# Altium PCB PCB1.PcbDoc
Units mil, origin at the board's own origin, x right, y up, seen from the top; angles counter-clockwise.
Board outline 3886.07 x 1561.03 mil, 2 copper layers (Top Layer, Bottom Layer); 74 components, 43 nets, 186 pads, 8 vias.
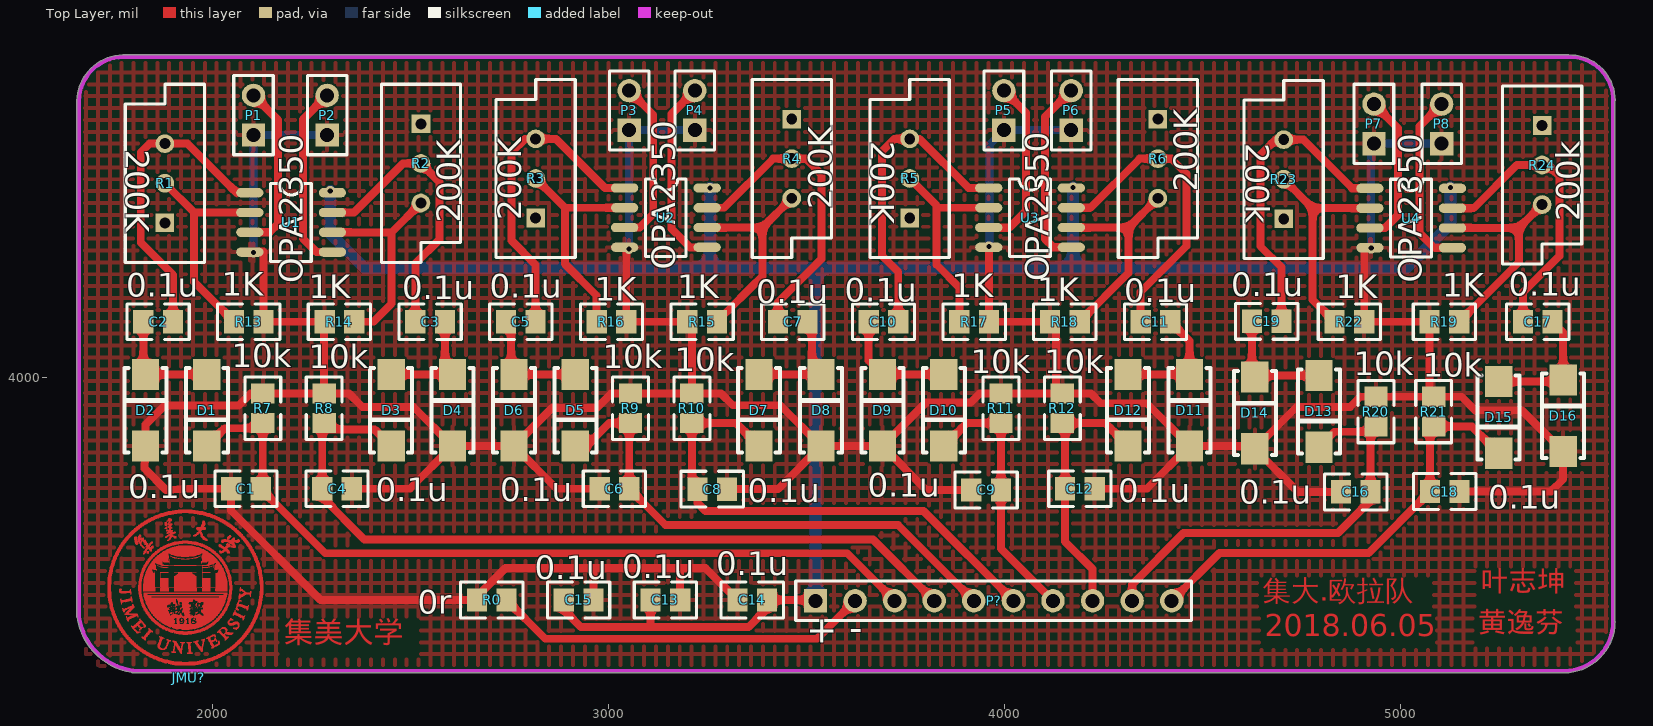
[diagram p0: Top Layer view]
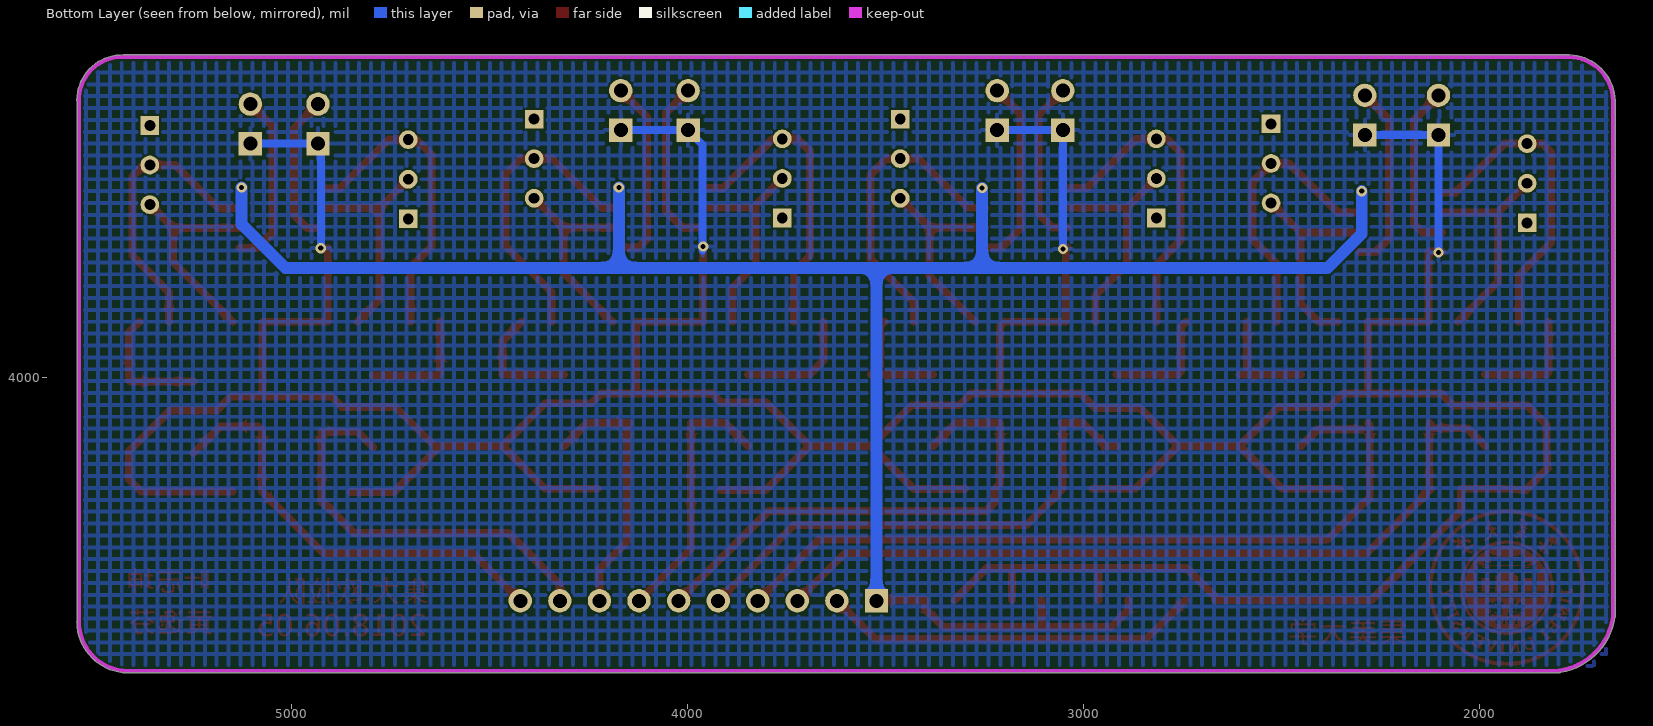
[diagram p1: Bottom Layer view, seen from below]
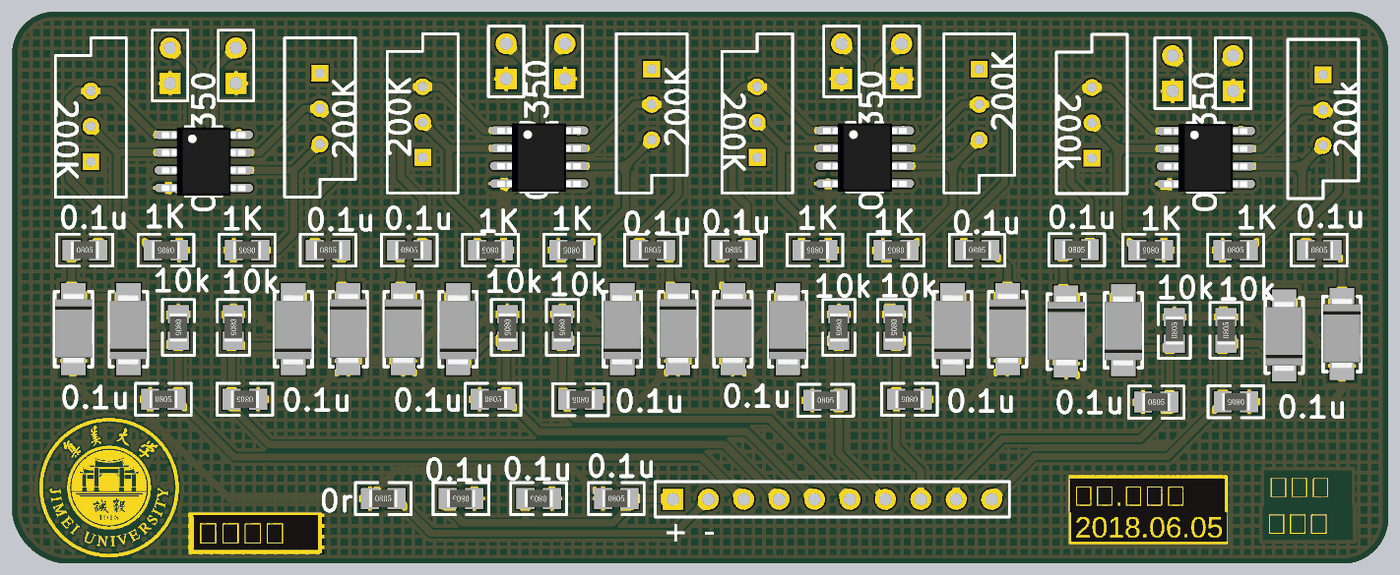
[diagram p2: 3D render of the assembled board from above, using the file's embedded part models]

## Layer stack, top to bottom
Top Solder: solder mask 0.4, Solder Resist, Dk 3.5
Top Layer: signal copper 1.4
Dielectric 1: dielectric 12.6, FR-4, Dk 4.8
Bottom Layer: signal copper 1.4
Bottom Solder: solder mask 0.4, Solder Resist, Dk 3.5

## Board outline
1794.62,3254.3 cw(c1821,3418) 1657.04,3393.25 cw(c1662,3394) 1656.98,3394 1656.98,4698 cw(c1662,4698) 1656.99,4698.09 cw(c1775,4696) 1772.91,4814.01 cw(c1773,4809) 1773,4814.02 5425.93,4814.02 cw(c5429,4700) 5543.06,4700 cw(c5429,4700) 5543.02,4696.93 cw(c5429,4700) 5543.01,4696.86 5543.02,4697 5543.02,3382.4 cw(c5538.02,3382) 5543.03,3382 cw(c5414,3382) 5543.01,3379.92 ccw(c5538,3380) 5543.02,3380 5543.01,3379.92 cw(c5414,3382) 5416.08,3252.99 cw(c5416,3258) 5416,3252.99 1798,3252.99 cw(c1798,3258)

## Design rules (kind name [scope] priority, off if disabled: settings)
Clearance [All] p1: gap=5
PolygonConnect [All] p1: connectstyle=Relief reliefconductorwidth=10 reliefentries=4 polygonreliefangle="90 Angle" airgapwidth=10
RoutingVias [All] p1: holewidth=28 width=50 viastyle="Through Hole" minholewidth=28 minwidth=50 maxholewidth=28 maxwidth=50
SolderMaskExpansion [All] p1: expansion=4
Width [All] p1: maxlimit=60 minlimit=10 preferedwidth=10 minimp=50.000000 maximp=50.000000 favimp=50.000000
30 further rules are at their usual default settings.

## Components (designator, comment, footprint, x,y, rotation, side; value= is the part's Value field where it differs from the comment)
C1 "0.1u" 0805 2084,3723 r0 top
C2 "0.1u" 0805 1862,4145 r0 top
C3 "0.1u" 0805 2549.27,4145 r0 top
C4 "0.1u" 0805 2314,3713 r180 top
C5 "0.1u" 0805 2778.36,4145 r0 top
C6 "0.1u" 0805 3015,3723 r0 top
C7 "0.1u" 0805 3465.64,4145 r0 top
C8 "0.1u" 0805 3262,3712 r180 top
C9 "0.1u" 0805 3954,3720 r0 top
C10 "0.1u" 0805 3694.73,4145 r0 top
C11 "0.1u" 0805 4382,4145 r0 top
C12 "0.1u" 0805 4191,3713 r180 top
C13 "0.1u" 0805 3143.67,3432 r180 top
C14 "0.1u" 0805 3363,3442 r0 top
C15 "0.1u" 0805 2924.33,3432 r180 top
C16 "0.1u" 0805 4888,3715 r0 top
C17 "0.1u" 0805 5348,4145 r0 top
C18 "0.1u" 0805 5113,3706 r180 top
C19 "0.1u" 0805 4663,4146 r0 top
D1 "二极管" 二极管 1985.18,3912 r270 top
D2 "二极管" 二极管 1830,3920.9 r90 top
D3 "二极管" 二极管 2450.71,3912 r270 top
D4 "二极管" 二极管 2605.88,3920.9 r90 top
D5 "二极管" 二极管 2916.23,3912 r270 top
D6 "二极管" 二极管 2761.06,3920.9 r90 top
D7 "二极管" 二极管 3380,3912 r270 top
D8 "二极管" 二极管 3536.94,3920.9 r90 top
D9 "二极管" 二极管 3692.12,3920.9 r90 top
D10 "二极管" 二极管 3847.29,3912 r270 top
D11 "二极管" 二极管 4468,3920.9 r90 top
D12 "二极管" 二极管 4312.82,3912 r270 top
D13 "二极管" 二极管 4795,3909 r270 top
D14 "二极管" 二极管 4633,3914 r90 top
D15 "二极管" 二极管 5249,3894 r270 top
D16 "二极管" 二极管 5412,3907 r90 top
JMU? "LOGO(JMU)" JMU_logo（1） 1940,3241 r0 top
P1 "Header 2" HDR1X2 2103,4612 r90 top
P2 "Header 2" HDR1X2 2289,4612 r90 top
P3 "Header 2" HDR1X2 3052,4624 r90 top
P4 "Header 2" HDR1X2 3218,4624 r90 top
P5 "Header 2" HDR1X2 3999,4624 r90 top
P6 "Header 2" HDR1X2 4169,4624 r90 top
P7 "Header 2" HDR1X2 4934,4590 r90 top
P8 "Header 2" HDR1X2 5105,4590 r90 top
P? "Header 10" HDR1X10 3523,3435 r0 top
R0 "0r" 0805 2705,3442 r0 top
R1 "200K" VR5 1879,4490 r90 top
R2 "200K" VR5 2526,4540 r270 top
R3 "200K" VR5 2816,4502 r90 top
R4 "200K" VR5 3463,4552 r270 top
R5 "200K" VR5 3761,4502 r90 top
R6 "200K" VR5 4388,4552 r270 top
R7 "10k" 0805 2131.42,3921.31 r270 top
R8 "10k" 0805 2286.59,3921.31 r270 top
R9 "10k" 0805 3060.47,3921.31 r270 top
R10 "10k" 0805 3215.65,3921.31 r270 top
R11 "10k" 0805 3996.53,3921.31 r270 top
R12 "10k" 0805 4151.71,3921.31 r270 top
R13 "1K" 0805 2091.09,4135 r180 top
R14 "1K" 0805 2320.18,4135 r180 top
R15 "1K" 0805 3236.55,4135 r180 top
R16 "1K" 0805 3007.45,4135 r180 top
R17 "1K" 0805 3923.82,4135 r180 top
R18 "1K" 0805 4152.91,4135 r180 top
R19 "1K" 0805 5112,4145 r0 top
R20 "10k" 0805 4934,3913 r90 top
R21 "10k" 0805 5080,3913 r90 top
R22 "1K" 0805 4872,4135 r180 top
R23 "200k" VR5 4706,4500 r90 top
R24 "200k" VR5 5359,4536 r270 top
U1 "OPA2350" SOIC-8 2198,4391 r0 top
U2 "OPA2350" SOIC-8 3145,4403 r0 top
U3 "OPA2350" SOIC-8 4065,4403 r0 top
U4 "OPA2350" SOIC-8 5028,4402 r0 top

## Footprints (in the part's own frame and the unit in brackets; to place one, negate y for a bottom-side part, rotate by r counter-clockwise, add the part's x,y. Pads: shape width x height; smd on the part's side, far side on the other; paste and mask are expansions set on the pad)
0805 [mm]
  rect 1.3x1.5 smd: 1(-0.95,-0.127) 2(0.95,-0.127)
  silkscreen extent -2,-1.28 2,1.02, body extent -1,-0.76 1,0.5, height 0.55
HDR1X2 [mm] "Connector; Header; 2 Position"
  rect 1.5x1.5 hole 0.9: 1(0,0)
  round 1.5 hole 0.9: 2(2.54,0)
  silkscreen extent -1.27,-1.27 3.81,1.27
HDR1X10 [mm] "Connector; Header; 10 Position"
  rect 1.5x1.5 hole 0.9: 1(0,0)
  round 1.5 hole 0.9: 2(2.54,0) 3(5.08,0) 4(7.62,0) 5(10.16,0) 6(12.7,0) 7(15.24,0) 8(17.78,0) 9(20.32,0) 10(22.86,0)
  silkscreen extent -1.27,-1.27 24.13,1.27
JMU_logo（1） [mil]
  Top Layer region: 8.21,175.64 7.21,175.64 7.21,176.64 8.21,176.64
  Top Layer region: 27.21,181.64 26.21,181.64 26.21,180.64 24.21,180.64 24.21,183.64 27.21,183.64
  Top Layer region: -42.79,162.64 -43.79,162.64 -43.79,161.64 -46.79,161.64 -46.79,163.64 -44.79,163.64 -44.79,164.64 -42.79,164.64
  Top Layer region: -32.79,175.64 -31.79,175.64 -31.79,174.64 -30.79,174.64 -30.79,173.64 -31.79,173.64 -31.79,172.64 -32.79,172.64 -32.79,171.64 -33.79,171.64 -33.79,176.64 -32.79,176.64
  Top Layer region: -29.79,165.64 -30.79,165.64 -30.79,164.64 -31.79,164.64 -31.79,163.64 -33.79,163.64 -33.79,164.64 -34.79,164.64 -34.79,166.64 -31.79,166.64 -31.79,167.64 -29.79,167.64
  Top Layer region: -103.79,318.64 -101.79,318.64 -101.79,313.64 -102.79,313.64 -102.79,312.64 -104.79,312.64 -104.79,313.64 -105.79,313.64 -105.79,314.64 -106.79,314.64 -106.79,319.64 -103.79,319.64
  Top Layer region: -89.79,330.64 -88.79,330.64 -88.79,329.64 -89.79,329.64 -89.79,327.64 -90.79,327.64 -90.79,326.64 -92.79,326.64 -92.79,325.64 -93.79,325.64 -93.79,324.64 -95.79,324.64 -95.79,325.64 -94.79,325.64 -94.79,327.64 -95.79,327.64 -95.79,326.64 -97.79,326.64 -97.79,328.64 -96.79,328.64 -96.79,329.64 -95.79,329.64 -95.79,330.64 -94.79,330.64 -94.79,331.64 -92.79,331.64 -92.79,332.64 -89.79,332.64
  Top Layer region: -40.79,358.64 -37.79,358.64 -37.79,357.64 -34.79,357.64 -34.79,356.64 -32.79,356.64 -32.79,355.64 -31.79,355.64 -31.79,352.64 -32.79,352.64 -32.79,351.64 -36.79,351.64 -36.79,352.64 -37.79,352.64 -37.79,354.64 -39.79,354.64 -39.79,355.64 -41.79,355.64 -41.79,356.64 -42.79,356.64 -42.79,358.64 -41.79,358.64 -41.79,359.64 -40.79,359.64
  Top Layer region: 105.21,357.64 106.21,357.64 106.21,355.64 105.21,355.64 105.21,354.64 104.21,354.64 104.21,353.64 103.21,353.64 103.21,351.64 102.21,351.64 102.21,350.64 101.21,350.64 101.21,349.64 99.21,349.64 99.21,348.64 97.21,348.64 97.21,349.64 96.21,349.64 96.21,352.64 97.21,352.64 97.21,354.64 98.21,354.64 98.21,355.64 99.21,355.64 99.21,356.64 100.21,356.64 100.21,357.64 101.21,357.64 101.21,359.64 105.21,359.64
  Top Layer region: 7.21,87.64 4.21,87.64 4.21,86.64 3.21,86.64 3.21,78.64 4.21,78.64 4.21,64.64 5.21,64.64 5.21,62.64 9.21,62.64 9.21,61.64 8.21,61.64 8.21,60.64 -4.79,60.64 -4.79,61.64 -3.79,61.64 -3.79,62.64 -0.79,62.64 -0.79,72.64 -1.79,72.64 -1.79,86.64 -3.79,86.64 -3.79,87.64 -5.79,87.64 -5.79,89.64 7.21,89.64
  Top Layer region: -100.79,123.64 -99.79,123.64 -99.79,122.64 -98.79,122.64 -98.79,121.64 -97.79,121.64 -97.79,120.64 -96.79,120.64 -96.79,119.64 -94.79,119.64 -94.79,118.64 -93.79,118.64 -93.79,117.64 -92.79,117.64 -92.79,116.64 -91.79,116.64 -91.79,114.64 -93.79,114.64 -93.79,115.64 -96.79,115.64 -96.79,114.64 -97.79,114.64 -97.79,113.64 -98.79,113.64 -98.79,112.64 -99.79,112.64 -99.79,111.64 -100.79,111.64 -100.79,109.64 -101.79,109.64 -101.79,108.64 -102.79,108.64 -102.79,107.64 -103.79,107.64 -103.79,106.64 -104.79,106.64 -104.79,105.64 -105.79,105.64 -105.79,103.64 -106.79,103.64 -106.79,102.64 -107.79,102.64 -107.79,101.64 -108.79,101.64 -108.79,100.64 -109.79,100.64 -109.79,98.64 -110.79,98.64 -110.79,96.64 -109.79,96.64 -109.79,95.64 -108.79,95.64 -108.79,94.64 -109.79,94.64 -109.79,93.64 -110.79,93.64 -110.79,94.64 -111.79,94.64 -111.79,95.64 -112.79,95.64 -112.79,96.64 -113.79,96.64 -113.79,97.64 -115.79,97.64 -115.79,98.64 -116.79,98.64 -116.79,99.64 -117.79,99.64 -117.79,100.64 -118.79,100.64 -118.79,101.64 -119.79,101.64 -119.79,102.64 -116.79,102.64 -116.79,101.64 -114.79,101.64 -114.79,102.64 -113.79,102.64 -113.79,103.64 -112.79,103.64 -112.79,104.64 -111.79,104.64 -111.79,106.64 -110.79,106.64 -110.79,107.64 -109.79,107.64 -109.79,108.64 -108.79,108.64 -108.79,109.64 -107.79,109.64 -107.79,111.64 -106.79,111.64 -106.79,112.64 -105.79,112.64 -105.79,113.64 -104.79,113.64 -104.79,114.64 -103.79,114.64 -103.79,115.64 -102.79,115.64 -102.79,117.64 -101.79,117.64 -101.79,118.64 -100.79,118.64 -100.79,121.64 -101.79,121.64 -101.79,122.64 -102.79,122.64 -102.79,123.64 -101.79,123.64 -101.79,124.64 -100.79,124.64
  Top Layer region: -144.79,199.64 -143.79,199.64 -143.79,194.64 -142.79,194.64 -142.79,190.64 -144.79,190.64 -144.79,192.64 -145.79,192.64 -145.79,193.64 -150.79,193.64 -150.79,192.64 -155.79,192.64 -155.79,191.64 -160.79,191.64 -160.79,190.64 -165.79,190.64 -165.79,189.64 -168.79,189.64 -168.79,188.64 -169.79,188.64 -169.79,184.64 -170.79,184.64 -170.79,185.64 -171.79,185.64 -171.79,190.64 -172.79,190.64 -172.79,195.64 -173.79,195.64 -173.79,197.64 -172.79,197.64 -172.79,198.64 -171.79,198.64 -171.79,196.64 -170.79,196.64 -170.79,195.64 -169.79,195.64 -169.79,194.64 -168.79,194.64 -168.79,195.64 -162.79,195.64 -162.79,196.64 -158.79,196.64 -158.79,197.64 -152.79,197.64 -152.79,198.64 -148.79,198.64 -148.79,199.64 -146.79,199.64 -146.79,203.64 -144.79,203.64
  Top Layer region: 117.21,168.64 118.21,168.64 118.21,167.64 117.21,167.64 117.21,164.64 118.21,164.64 118.21,163.64 120.21,163.64 120.21,162.64 122.21,162.64 122.21,161.64 124.21,161.64 124.21,160.64 126.21,160.64 126.21,159.64 128.21,159.64 128.21,158.64 130.21,158.64 130.21,157.64 132.21,157.64 132.21,156.64 134.21,156.64 134.21,155.64 136.21,155.64 136.21,154.64 139.21,154.64 139.21,155.64 140.21,155.64 140.21,156.64 142.21,156.64 142.21,155.64 141.21,155.64 141.21,153.64 140.21,153.64 140.21,150.64 139.21,150.64 139.21,148.64 138.21,148.64 138.21,146.64 137.21,146.64 137.21,144.64 135.21,144.64 135.21,149.64 134.21,149.64 134.21,150.64 132.21,150.64 132.21,151.64 129.21,151.64 129.21,152.64 128.21,152.64 128.21,153.64 126.21,153.64 126.21,154.64 124.21,154.64 124.21,155.64 122.21,155.64 122.21,156.64 120.21,156.64 120.21,157.64 118.21,157.64 118.21,158.64 116.21,158.64 116.21,159.64 114.21,159.64 114.21,158.64 113.21,158.64 113.21,157.64 112.21,157.64 112.21,156.64 111.21,156.64 111.21,157.64 110.21,157.64 110.21,158.64 111.21,158.64 111.21,160.64 112.21,160.64 112.21,162.64 113.21,162.64 113.21,164.64 114.21,164.64 114.21,166.64 115.21,166.64 115.21,168.64 116.21,168.64 116.21,169.64 117.21,169.64
  Top Layer region: -170.79,223.64 -169.79,223.64 -169.79,221.64 -170.79,221.64 -170.79,220.64 -171.79,220.64 -171.79,219.64 -173.79,219.64 -173.79,217.64 -162.79,217.64 -162.79,218.64 -150.79,218.64 -150.79,219.64 -148.79,219.64 -148.79,223.64 -146.79,223.64 -146.79,216.64 -145.79,216.64 -145.79,210.64 -146.79,210.64 -146.79,209.64 -147.79,209.64 -147.79,212.64 -148.79,212.64 -148.79,213.64 -158.79,213.64 -158.79,212.64 -172.79,212.64 -172.79,213.64 -173.79,213.64 -173.79,214.64 -174.79,214.64 -174.79,215.64 -175.79,215.64 -175.79,217.64 -176.79,217.64 -176.79,221.64 -175.79,221.64 -175.79,223.64 -174.79,223.64 -174.79,224.64 -170.79,224.64
  Top Layer region: 128.21,195.64 131.21,195.64 131.21,194.64 133.21,194.64 133.21,192.64 127.21,192.64 127.21,190.64 126.21,190.64 126.21,188.64 125.21,188.64 125.21,186.64 126.21,186.64 126.21,185.64 129.21,185.64 129.21,184.64 132.21,184.64 132.21,183.64 136.21,183.64 136.21,182.64 139.21,182.64 139.21,181.64 142.21,181.64 142.21,180.64 145.21,180.64 145.21,179.64 148.21,179.64 148.21,180.64 149.21,180.64 149.21,182.64 151.21,182.64 151.21,179.64 150.21,179.64 150.21,176.64 149.21,176.64 149.21,172.64 148.21,172.64 148.21,169.64 146.21,169.64 146.21,173.64 145.21,173.64 145.21,174.64 143.21,174.64 143.21,175.64 140.21,175.64 140.21,176.64 137.21,176.64 137.21,177.64 134.21,177.64 134.21,178.64 130.21,178.64 130.21,179.64 127.21,179.64 127.21,180.64 124.21,180.64 124.21,181.64 123.21,181.64 123.21,178.64 122.21,178.64 122.21,174.64 123.21,174.64 123.21,172.64 125.21,172.64 125.21,171.64 126.21,171.64 126.21,170.64 122.21,170.64 122.21,171.64 119.21,171.64 119.21,172.64 118.21,172.64 118.21,174.64 119.21,174.64 119.21,178.64 120.21,178.64 120.21,181.64 121.21,181.64 121.21,184.64 122.21,184.64 122.21,187.64 123.21,187.64 123.21,190.64 124.21,190.64 124.21,194.64 125.21,194.64 125.21,196.64 128.21,196.64
  Top Layer region: 40.21,95.64 39.21,95.64 39.21,94.64 38.21,94.64 38.21,90.64 37.21,90.64 37.21,84.64 36.21,84.64 36.21,78.64 35.21,78.64 35.21,73.64 34.21,73.64 34.21,72.64 35.21,72.64 35.21,71.64 34.21,71.64 34.21,66.64 33.21,66.64 33.21,64.64 32.21,64.64 32.21,65.64 31.21,65.64 31.21,66.64 30.21,66.64 30.21,67.64 29.21,67.64 29.21,68.64 28.21,68.64 28.21,70.64 27.21,70.64 27.21,71.64 26.21,71.64 26.21,72.64 25.21,72.64 25.21,74.64 24.21,74.64 24.21,75.64 23.21,75.64 23.21,76.64 22.21,76.64 22.21,78.64 21.21,78.64 21.21,79.64 20.21,79.64 20.21,81.64 19.21,81.64 19.21,82.64 18.21,82.64 18.21,83.64 17.21,83.64 17.21,85.64 16.21,85.64 16.21,86.64 15.21,86.64 15.21,87.64 14.21,87.64 14.21,88.64 11.21,88.64 11.21,90.64 14.21,90.64 14.21,91.64 18.21,91.64 18.21,92.64 22.21,92.64 22.21,93.64 23.21,93.64 23.21,90.64 20.21,90.64 20.21,89.64 21.21,89.64 21.21,87.64 22.21,87.64 22.21,85.64 23.21,85.64 23.21,84.64 24.21,84.64 24.21,83.64 25.21,83.64 25.21,81.64 26.21,81.64 26.21,80.64 27.21,80.64 27.21,79.64 28.21,79.64 28.21,77.64 29.21,77.64 29.21,76.64 30.21,76.64 30.21,75.64 31.21,75.64 31.21,74.64 32.21,74.64 32.21,79.64 33.21,79.64 33.21,84.64 34.21,84.64 34.21,91.64 35.21,91.64 35.21,93.64 31.21,93.64 31.21,95.64 34.21,95.64 34.21,96.64 39.21,96.64 39.21,97.64 40.21,97.64
  Top Layer region: 106.21,148.64 108.21,148.64 108.21,147.64 110.21,147.64 110.21,146.64 112.21,146.64 112.21,144.64 104.21,144.64 104.21,143.64 103.21,143.64 103.21,142.64 102.21,142.64 102.21,141.64 101.21,141.64 101.21,138.64 102.21,138.64 102.21,137.64 103.21,137.64 103.21,136.64 108.21,136.64 108.21,137.64 110.21,137.64 110.21,138.64 112.21,138.64 112.21,139.64 115.21,139.64 115.21,140.64 123.21,140.64 123.21,139.64 124.21,139.64 124.21,138.64 125.21,138.64 125.21,137.64 126.21,137.64 126.21,136.64 127.21,136.64 127.21,128.64 126.21,128.64 126.21,127.64 125.21,127.64 125.21,125.64 124.21,125.64 124.21,124.64 123.21,124.64 123.21,123.64 121.21,123.64 121.21,120.64 119.21,120.64 119.21,121.64 117.21,121.64 117.21,122.64 115.21,122.64 115.21,123.64 112.21,123.64 112.21,125.64 120.21,125.64 120.21,126.64 122.21,126.64 122.21,127.64 123.21,127.64 123.21,128.64 124.21,128.64 124.21,132.64 123.21,132.64 123.21,134.64 120.21,134.64 120.21,135.64 118.21,135.64 118.21,134.64 115.21,134.64 115.21,133.64 113.21,133.64 113.21,132.64 111.21,132.64 111.21,131.64 107.21,131.64 107.21,130.64 105.21,130.64 105.21,131.64 102.21,131.64 102.21,132.64 101.21,132.64 101.21,133.64 100.21,133.64 100.21,134.64 99.21,134.64 99.21,136.64 98.21,136.64 98.21,140.64 99.21,140.64 99.21,142.64 100.21,142.64 100.21,144.64 101.21,144.64 101.21,145.64 102.21,145.64 102.21,146.64 104.21,146.64 104.21,149.64 106.21,149.64
  Top Layer region: 130.21,227.64 131.21,227.64 131.21,224.64 132.21,224.64 132.21,223.64 134.21,223.64 134.21,222.64 135.21,222.64 135.21,221.64 136.21,221.64 136.21,220.64 137.21,220.64 137.21,219.64 139.21,219.64 139.21,218.64 140.21,218.64 140.21,217.64 141.21,217.64 141.21,216.64 142.21,216.64 142.21,215.64 144.21,215.64 144.21,214.64 152.21,214.64 152.21,213.64 154.21,213.64 154.21,214.64 155.21,214.64 155.21,217.64 157.21,217.64 157.21,212.64 156.21,212.64 156.21,204.64 154.21,204.64 154.21,207.64 153.21,207.64 153.21,208.64 148.21,208.64 148.21,209.64 143.21,209.64 143.21,208.64 141.21,208.64 141.21,207.64 139.21,207.64 139.21,206.64 137.21,206.64 137.21,205.64 135.21,205.64 135.21,204.64 134.21,204.64 134.21,203.64 132.21,203.64 132.21,202.64 130.21,202.64 130.21,201.64 129.21,201.64 129.21,200.64 128.21,200.64 128.21,198.64 126.21,198.64 126.21,206.64 127.21,206.64 127.21,211.64 129.21,211.64 129.21,208.64 131.21,208.64 131.21,209.64 133.21,209.64 133.21,210.64 135.21,210.64 135.21,211.64 137.21,211.64 137.21,212.64 139.21,212.64 139.21,213.64 140.21,213.64 140.21,214.64 139.21,214.64 139.21,215.64 138.21,215.64 138.21,216.64 136.21,216.64 136.21,217.64 135.21,217.64 135.21,218.64 134.21,218.64 134.21,219.64 132.21,219.64 132.21,220.64 130.21,220.64 130.21,218.64 128.21,218.64 128.21,224.64 129.21,224.64 129.21,228.64 130.21,228.64
  Top Layer region: -73.79,103.64 -71.79,103.64 -71.79,102.64 -68.79,102.64 -68.79,101.64 -66.79,101.64 -66.79,100.64 -63.79,100.64 -63.79,99.64 -62.79,99.64 -62.79,97.64 -64.79,97.64 -64.79,98.64 -66.79,98.64 -66.79,97.64 -67.79,97.64 -67.79,95.64 -68.79,95.64 -68.79,92.64 -69.79,92.64 -69.79,89.64 -70.79,89.64 -70.79,87.64 -71.79,87.64 -71.79,84.64 -72.79,84.64 -72.79,81.64 -73.79,81.64 -73.79,76.64 -72.79,76.64 -72.79,75.64 -71.79,75.64 -71.79,74.64 -70.79,74.64 -70.79,73.64 -68.79,73.64 -68.79,72.64 -62.79,72.64 -62.79,73.64 -61.79,73.64 -61.79,74.64 -60.79,74.64 -60.79,75.64 -59.79,75.64 -59.79,76.64 -58.79,76.64 -58.79,78.64 -57.79,78.64 -57.79,81.64 -56.79,81.64 -56.79,84.64 -55.79,84.64 -55.79,86.64 -54.79,86.64 -54.79,89.64 -53.79,89.64 -53.79,93.64 -54.79,93.64 -54.79,94.64 -55.79,94.64 -55.79,96.64 -53.79,96.64 -53.79,95.64 -50.79,95.64 -50.79,94.64 -48.79,94.64 -48.79,93.64 -45.79,93.64 -45.79,91.64 -49.79,91.64 -49.79,90.64 -50.79,90.64 -50.79,88.64 -51.79,88.64 -51.79,86.64 -52.79,86.64 -52.79,83.64 -53.79,83.64 -53.79,80.64 -54.79,80.64 -54.79,78.64 -55.79,78.64 -55.79,76.64 -56.79,76.64 -56.79,74.64 -57.79,74.64 -57.79,72.64 -59.79,72.64 -59.79,71.64 -60.79,71.64 -60.79,70.64 -62.79,70.64 -62.79,69.64 -68.79,69.64 -68.79,70.64 -71.79,70.64 -71.79,71.64 -73.79,71.64 -73.79,72.64 -75.79,72.64 -75.79,73.64 -76.79,73.64 -76.79,74.64 -77.79,74.64 -77.79,76.64 -78.79,76.64 -78.79,83.64 -77.79,83.64 -77.79,86.64 -76.79,86.64 -76.79,89.64 -75.79,89.64 -75.79,91.64 -74.79,91.64 -74.79,94.64 -73.79,94.64 -73.79,97.64 -72.79,97.64 -72.79,101.64 -74.79,101.64 -74.79,104.64 -73.79,104.64
  Top Layer region: 215 vertices and 0 holes, not listed, extent -145.79,111.64 -108.79,148.64
  Top Layer region: 177 vertices and 0 holes, not listed, extent 43.21,73.64 78.21,109.64
  Top Layer region: -37.79,91.64 -32.79,91.64 -32.79,90.64 -31.79,90.64 -31.79,88.64 -30.79,88.64 -30.79,86.64 -29.79,86.64 -29.79,85.64 -28.79,85.64 -28.79,83.64 -27.79,83.64 -27.79,82.64 -26.79,82.64 -26.79,80.64 -25.79,80.64 -25.79,78.64 -24.79,78.64 -24.79,77.64 -23.79,77.64 -23.79,75.64 -22.79,75.64 -22.79,73.64 -21.79,73.64 -21.79,72.64 -20.79,72.64 -20.79,70.64 -19.79,70.64 -19.79,78.64 -18.79,78.64 -18.79,87.64 -21.79,87.64 -21.79,89.64 -14.79,89.64 -14.79,88.64 -10.79,88.64 -10.79,87.64 -11.79,87.64 -11.79,86.64 -14.79,86.64 -14.79,84.64 -15.79,84.64 -15.79,78.64 -16.79,78.64 -16.79,70.64 -17.79,70.64 -17.79,62.64 -18.79,62.64 -18.79,60.64 -20.79,60.64 -20.79,62.64 -21.79,62.64 -21.79,63.64 -22.79,63.64 -22.79,65.64 -23.79,65.64 -23.79,66.64 -24.79,66.64 -24.79,68.64 -25.79,68.64 -25.79,70.64 -26.79,70.64 -26.79,71.64 -27.79,71.64 -27.79,73.64 -28.79,73.64 -28.79,74.64 -29.79,74.64 -29.79,76.64 -30.79,76.64 -30.79,78.64 -31.79,78.64 -31.79,80.64 -32.79,80.64 -32.79,81.64 -33.79,81.64 -33.79,83.64 -34.79,83.64 -34.79,79.64 -35.79,79.64 -35.79,71.64 -36.79,71.64 -36.79,64.64 -33.79,64.64 -33.79,62.64 -41.79,62.64 -41.79,63.64 -44.79,63.64 -44.79,64.64 -43.79,64.64 -43.79,65.64 -40.79,65.64 -40.79,66.64 -39.79,66.64 -39.79,71.64 -38.79,71.64 -38.79,79.64 -37.79,79.64 -37.79,86.64 -36.79,86.64 -36.79,87.64 -37.79,87.64 -37.79,89.64 -39.79,89.64 -39.79,90.64 -40.79,90.64 -40.79,92.64 -37.79,92.64
  Top Layer region: 139 vertices and 1 holes, not listed, extent 71.21,93.64 111.21,127.64
  Top Layer region: 195 vertices and 0 holes, not listed, extent -168.79,142.64 -127.79,185.64
  Top Layer region: 155 vertices and 0 holes, not listed, extent 10.21,345.64 47.21,395.64
  Top Layer region: 241 vertices and 4 holes, not listed, extent -60.79,345.64 -33.79,402.64
  Top Layer region: 219 vertices and 1 holes, not listed, extent -138.79,311.64 -91.79,360.64
  Top Layer region: 251 vertices and 0 holes, not listed, extent 75.21,313.64 128.21,352.64
  Top Layer region: 261 vertices and 22 holes, not listed, extent -114.79,120.64 96.21,214.64
  Top Layer region: 309 vertices and 19 holes, not listed, extent -115.79,217.64 97.21,333.64
  Top Layer region: 557 vertices and 1 holes, not listed, extent -127.79,108.64 109.21,345.64
  Top Layer region: 917 vertices and 1 holes, not listed, extent -205.79,30.64 187.21,423.64
SOIC-8 [mm]
  oval 1.75x0.6 smd: 1(-2.65,1.905) 2(-2.65,0.635) 3(-2.65,-0.635) 4(-2.65,-1.905) 5(2.65,-1.905) 6(2.65,-0.635) 7(2.65,0.635) 8(2.65,1.905)
  silkscreen extent -1.32,-2.5 1.3,2.49, body extent -3,-2.47 2.99,2.43, height 1.55
VR5 [mm] "Thru-Hole; 3 Leads"
  rect 1.2x1.2 hole 0.7: 1(-2.54,0)
  round 1.2 hole 0.7: 2(0,0) 3(2.54,0)
  silkscreen extent -5.08,-2.54 6.35,2.54
二极管 [mm] "SS-14/M7"
  rect 2x1.75 smd: 1(-2.413,0) 2(2.187,0)
  silkscreen extent -2.81,-1.35 2.59,1.35, body extent -2.61,-1.34 2.49,1.33, height 2.12

## Part data
C1 C2 C3 C4 C5 C6 C7 C8 C9 C10 C11 C12 C13 C14 C15 C16 C17 C18 C19: library part Cap, "无极电容"
JMU?: library part JMU-LOGO
P1 P2 P3 P4 P5 P6 P7 P8: "Header, 2-Pin"
P?: "Header, 10-Pin"
R0 R7 R8 R9 R10 R11 R12 R13 R14 R15 R16 R17 R18 R19 R20 R21 R22: library part Res, "通用电阻"
R1 R2 R3 R4 R5 R6 R23 R24: library part RPot, "Potentiometer"
U1 U2 U3 U4: "运放芯片"

## Via types
v1: diameter 26, hole 13, Top Layer to Bottom Layer, 8 vias

## Nets (pads, with @x,y where several pads share a name; then routed paths per layer and width w, separated by ;. In a path a pad name is that pad's centre, name@x,y a point inside that pad or via, vN(x,y) a via of type N, cw(c..) or ccw(c..) an arc to the next point about the centre after c; other vN are vias at no path point)
AGND: C1.1 C4.1 C6.1 C8.1 C9.1 C12.1 C13.1 C14.1 C15.1 C16.1 C18.1 D2.1 D4.1 D6.1 D8.1 D9.1 D11.1 D14.1 D16.1 P1.1 P2.1 P3.1 P4.1 P5.1 P6.1 P7.1 P8.1 R0.1 R7.1 R8.1 R9.1 R10.1 R11.1 R12.1 R13.1 R14.2 R15.2 R16.1 R17.1 R18.2 R19.1 R20.2 R21.2 R22.1 U1.4 U2.4 U3.4 U4.4 | length 12023.6
  Top Layer w20: U1.4 2095.16,4317.49 2128.49,4317.49 R13.1 R14.2 ; R14.2@2281.59,4138.81 R8.1 ; C4.1 2497.98,3718 D4.1 ; C15.1 2961.74,3514.74 ; C6.1 2868.96,3718 D6.1 ; U2.4 3044.86,4323.81 R16.1 R15.2 3210.65,4128.49 R10.1 ; C13.1 3181.07,3514 ; C8.1 3428.04,3717 D8.1 ; C14.1 3244.6,3518 2740,3518 2667.6,3445.6 R0.1 2272,3437 2046.6,3662.4 C1.1 1937.9,3718 1881.92,3714.97 1827.97,3768.92 D2.1 1830,3880 1878,3928 2065,3928 2095.71,3958.71 R7.1 R8.1 ; C9.1 3803.01,3715 D9.1 ; U3.4@3961.22,4327.45 R17.1 4115.5,4139.09 4130.51,4139 R12.1@4130.51,3962.22 ; C12.1 4360.1,3718 D11.1 ; D14.1@4626.1,3825.9 D11.1 ; C16.1 4742,3710 D14.1 4739,3925 4874,3925 4899.4,3950.4 R20.2 R21.2 5155.6,3950.4 5190,3916 5308,3916 D16.1 5412,3742 5381,3711 C18.1 ; U4.4@4909.4,4326 R22.1 R19.1 R21.2@5074.6,3960.8 ; R8.1 2344.29,3958.71 2378,3925 2506.78,3925 D4.1 ; D4.1 D6.1 ; D6.1 2857.16,3922 2970,3922 3006.71,3958.71 R9.1 R10.1 ; R10.1 3284.29,3958.71 3314,3929 3433.84,3929 D8.1 ; D8.1 D9.1 ; D9.1 3802.22,3936 3915,3936 3937.71,3958.71 R11.1 R12.1 4219.29,3958.71 4244,3934 4359.9,3934 D11.1
  Bottom Layer w20: v1(2103,4315) P1.1 P2.1 ; v1(3052,4324) P3.1 P4.1 ; v1@3963,4320 3963,4588 P5.1 P6.1 ; v1(4927,4326) 4927,4583 P7.1 P8.1
  other v1: 3961,4330
GND: P?.2 R0.2 | length 961
  Top Layer w20: R0.2 2840.4,3339 3527,3339 P?.2
INA: P1.2 U1.3 | length 430.7
  Top Layer w20: U1.3 2144,4366 2165,4387 2165,4650 P1.2
INB: P2.2 U1.5 | length 475.7
  Top Layer w20: P2.2 2228,4651 2228,4350 2262,4316 U1.5
INC: P3.2 U2.3 | length 423.7
  Top Layer w20: U2.3 3079,4378 3113,4412 3113,4663 P3.2
IND: P4.2 U2.5 | length 483.2
  Top Layer w20: P4.2 3159,4665 3159,4375 3206,4328 U2.5
INE: P5.2 U3.3 | length 438.9
  Top Layer w20: U3.3 4013,4378 4055,4420 4055,4668 P5.2
INF: P6.2 U3.5 | length 477.4
  Top Layer w20: P6.2 4103,4658 4103,4349 4124,4328 U3.5
ING: P7.2 U4.3 | length 390.3
  Top Layer w20: U4.3 4962,4377 4995,4410 4995,4629 P7.2
INH: P8.2 U4.5 | length 447.9
  Top Layer w20: P8.2 5049,4634 5049,4364 5086,4327 U4.5
NetC2_1: C2.1 D1.1 D2.2 | length 290.4
  Top Layer w20: C2.1 1824.6,4012.4 D2.2 D1.1
NetC2_2: C2.2 R1.3 U1.1 | length 797.9
  Top Layer w20: C2.2 1899.4,4258.6 1818,4340 1818,4568 1840,4590 R1.3 1936,4590 2060,4466 U1.1
NetC3_1: C3.1 R2.2 U1.7 | length 719.8
  Top Layer w20: U1.7 2357,4416 2481,4540 R2.2 2573,4493 2573,4348 2511.87,4286.87 C3.1
NetC3_2: C3.2 D3.1 D4.2 | length 269
  Top Layer w20: D3.1 D4.2 ; D4.2@2586.67,4026.21 C3.2
NetC5_1: C5.1 D5.1 D6.2 | length 296.5
  Top Layer w20: C5.1 2754,4126.96 2754,4014.06 D6.2 D5.1
NetC5_2: C5.2 R3.3 U2.1 | length 804.3
  Top Layer w20: C5.2 2815.77,4284.23 2755,4345 2755,4568 2789,4602 R3.3 2867,4602 2991,4478 U2.1
NetC7_1: C7.1 R4.2 U2.7 | length 774.1
  Top Layer w20: U2.7 3292,4428 3416,4552 R4.2 3498,4552 3538,4512 3538,4299 3428.23,4189.23 C7.1
NetC7_2: C7.2 D7.1 D8.2 | length 304
  Top Layer w20: D7.1 D8.2 3514,4029.94 3514,4129.04 C7.2
NetC10_1: C10.1 D9.2 D10.1 | length 302.6
  Top Layer w20: C10.1 3657.33,4041.79 D9.2 D10.1
NetC10_2: C10.2 R5.3 U3.1 | length 781.9
  Top Layer w20: C10.2 3732.13,4265.87 3691,4307 3691,4571 3722,4602 R5.3 3786,4602 3910,4478 U3.1
NetC11_1: C11.1 R6.2 U3.7 | length 779.6
  Top Layer w20: U3.7 4218,4428 4342,4552 R6.2 4422,4552 4460,4514 4460,4331 4344.6,4215.6 C11.1
NetC11_2: C11.2 D11.2 D12.1 | length 308.3
  Top Layer w20: D12.1 D11.2 4468,4091.4 C11.2
NetC17_1: C17.1 R24.2 U4.7 | length 732.8
  Top Layer w20: U4.7 5186,4427 5295,4536 R24.2 5374,4536 5402.62,4507.38 5402.62,4306.62 5310.6,4214.6 C17.1
NetC17_2: C17.2 D15.1 D16.2 | length 322.6
  Top Layer w20: D15.1 5407.9,3989 D16.2 5412,4113.4 C17.2
NetC19_1: C19.1 D13.1 D14.2 | length 304.3
  Top Layer w20: C19.1 4625.6,4007.5 4629.1,4004 D13.1
NetC19_2: C19.2 R23.3 U4.1 | length 786.5
  Top Layer w20: C19.2 4700.4,4277.6 4647,4331 4647,4562 4685,4600 R23.3 4756,4600 4879,4477 U4.1
NetR1_2: R1.2 R13.2 U1.2 | length 563
  Top Layer w20: R1.2 1953,4416 ; R13.2 1953,4240.69 1953,4416 ; U1.2 1953,4416
NetR2_3: R2.3 R14.1 U1.6 | length 547.8
  Top Layer w20: U1.6 2452,4366 ; R14.1 2406,4140 2452,4186 2452,4366 ; R2.3 2452,4366
NetR3_2: R3.2 R16.2 U2.2 | length 576.5
  Top Layer w20: R3.2 2890,4428 ; R16.2 2970.05,4205.95 2890,4286 2890,4428 ; U2.2 2890,4428
NetR4_3: R4.3 R15.1 U2.6 | length 530
  Top Layer w20: U2.6 3389,4378 ; R15.1 3302.71,4168.76 3360.24,4226.29 3389,4255.05 3389,4378 ; R4.3 3389,4378
NetR5_2: R5.2 R17.2 U3.2 | length 539.6
  Top Layer w20: R5.2 3829,4434 3829,4284 3886.42,4226.58 R17.2 ; 3835,4428 U3.2
NetR6_3: R6.3 R18.1 U3.6 | length 538.6
  Top Layer w20: U3.6 4314,4378 ; R18.1 4314,4263.69 4314,4378 ; R6.3 4314,4378
NetR19_2: R19.2 R24.3 U4.6 | length 550.5
  Top Layer w20: U4.6 5300,4377 ; R19.2 5300,4290.6 5300,4377 ; R24.3 5300,4377
NetR22_2: R22.2 R23.2 U4.2 | length 557.9
  Top Layer w20: R23.2 4779,4427 ; R22.2 4779,4195.6 4779,4427 ; U4.2 4779,4427
OUTA: C1.2 D1.2 P?.3 R7.2 | length 2052.1
  Top Layer w20: D1.2 2030.28,3871 2113.51,3871 R7.2 2126.42,3723.01 C1.2 2284.4,3555 3603,3555 P?.3
OUTB: C4.2 D3.2 P?.4 R8.2 | length 2014.9
  Top Layer w20: R8.2 2276.6,3878.91 C4.2 2276.6,3696.4 2383,3590 3668,3590 P?.4 ; R8.2@2297.5,3868 2408.6,3868 D3.2
OUTC: C6.2 D5.2 P?.5 R9.2 | length 1318.3
  Top Layer w20: D5.2 2943.9,3825.9 3001.91,3883.91 R9.2 3052.4,3880.83 C6.2 3144.4,3626 3732,3626 P?.5
OUTD: C8.2 D7.2 P?.6 R10.2 | length 1301.5
  Top Layer w20: D7.2 3321.99,3883.91 R10.2 3210.65,3730.95 C8.2 3224.6,3682.4 3245,3662 3796,3662 P?.6
OUTE: C9.2 D10.2 P?.7 R11.2 | length 671.7
  Top Layer w20: D10.2 3905.3,3883.91 R11.2 3991.53,3715.13 C9.2 3991.4,3566.6 4024.3,3533.7 4090.1,3467.9 P?.7
OUTF: C12.2 D12.2 P?.8 R12.2 | length 670.6
  Top Layer w20: P?.8 4223,3515 4153.6,3584.4 C12.2 4153.6,3877.02 R12.2 4254.81,3883.91 D12.2
OUTG: C16.2 D13.2 P?.9 R20.1 | length 1051.6
  Top Layer w20: P?.9 4323,3476 4453,3606 4843,3606 4925.4,3688.4 C16.2 4925.4,3862 4834.1,3862 D13.2
OUTH: C18.2 D15.2 P?.10 R21.1 | length 1127.5
  Top Layer w20: P?.10 4544,3556 4920.6,3556 C18.2 5075.6,3866.2 R21.1 5181.3,3875.6 D15.2
VCC: C13.2 C14.2 C15.2 P?.1 U1.8 U2.8 U3.8 U4.8 | length 5144.4
  Top Layer w20: C15.2 2886.93,3412.07 2930,3369 3354,3369 3400.4,3415.4 C14.2 3521,3437 P?.1 ; 3106.27,3371.27 C13.2
  Bottom Layer w30: v1(2297,4470) 2297,4362 2383,4276 3256,4276 ; v1(3256,4478) 3256,4276 ; P?.1 3523,4276 ; v1(4174,4479) 4174,4276 ; v1(5127,4479) 5127,4386 5017,4276 4174,4276 ; 3256,4276 3523,4276 ; 3523,4276 4174,4276
pads on no net: R1.1 R2.1 R3.1 R4.1 R5.1 R6.1 R23.1 R24.1

## Polygon pours and split planes (outlines as drawn)
AGND on Bottom Layer "Top Layer-No Net" (hatched 90Degree grid 30 track 10, pour order 10): 1773,4809 1762,4809 ccw(c1762,4709) 1662,4709 1662,4698 1662,3394 1662,3358 ccw(c1762,3358) 1762,3258 1798,3258 5416,3258 5438,3258 ccw(c5438,3358) 5538,3358 5538,3396 5538,4700 cw(c5541,4700) 5541,4703 5541,4709 ccw(c5441,4709) 5441,4809 5426,4809 1773,4809
AGND on Top Layer "Top Layer-No Net" (hatched 90Degree grid 30 track 10, pour order 5): 1773,4809 1762,4809 ccw(c1762,4709) 1662,4709 1662,4645 1662,3394 1662,3358 ccw(c1762,3358) 1762,3258 1798,3258 5416,3258 5438,3258 ccw(c5438,3358) 5538,3358 5538,3380 5538,4696 5538,4709 ccw(c5438,4709) 5438,4809 5426,4809 1773,4809

## Keep-outs
Keep-Out Layer:
  lines w10: 1798,3258 5416,3258 ccw(c5414,3382) 5538.02,3382 ; 1798.12,3258.83 cw(c1821,3418) 1662,3394 1662,4698 cw(c1775,4696) 1773,4809 5426,4809 cw(c5429,4700) 5538,4697 5538,3380

## Other copper
Top Layer:
  text "叶志坤" at 5203,3441 h90
  text "集大.欧拉队" at 4653,3417 h90
  text "黄逸芬" at 5198,3338 h90
  text "2018.06.05" at 4658,3327 h95
  text "集美大学" at 2179,3310 h95

## Silkscreen, mask and mechanical layers (free items; w line width, h text height)
Top Overlay:
  text "-" at 3608,3311 h118.11
  text "+" at 3500,3306 h118.11
Top Solder:
  rectangle: 4640,3308 5089,3504
  rectangle: 2154,3280 2538,3398
  text "叶志坤" at 5203,3442 h90
  text "黄逸芬" at 5198,3338 h90